# Altium PCB meteo_main.PcbDoc
Units mm, origin at the board's own origin, x right, y up, seen from the top; angles counter-clockwise.
Board outline 190 x 93 mm, 2 copper layers (Top Layer, Bottom Layer); 12 components, 63 nets, 42 pads, 0 vias.
Unrouted connection lines stored in the file: 5.
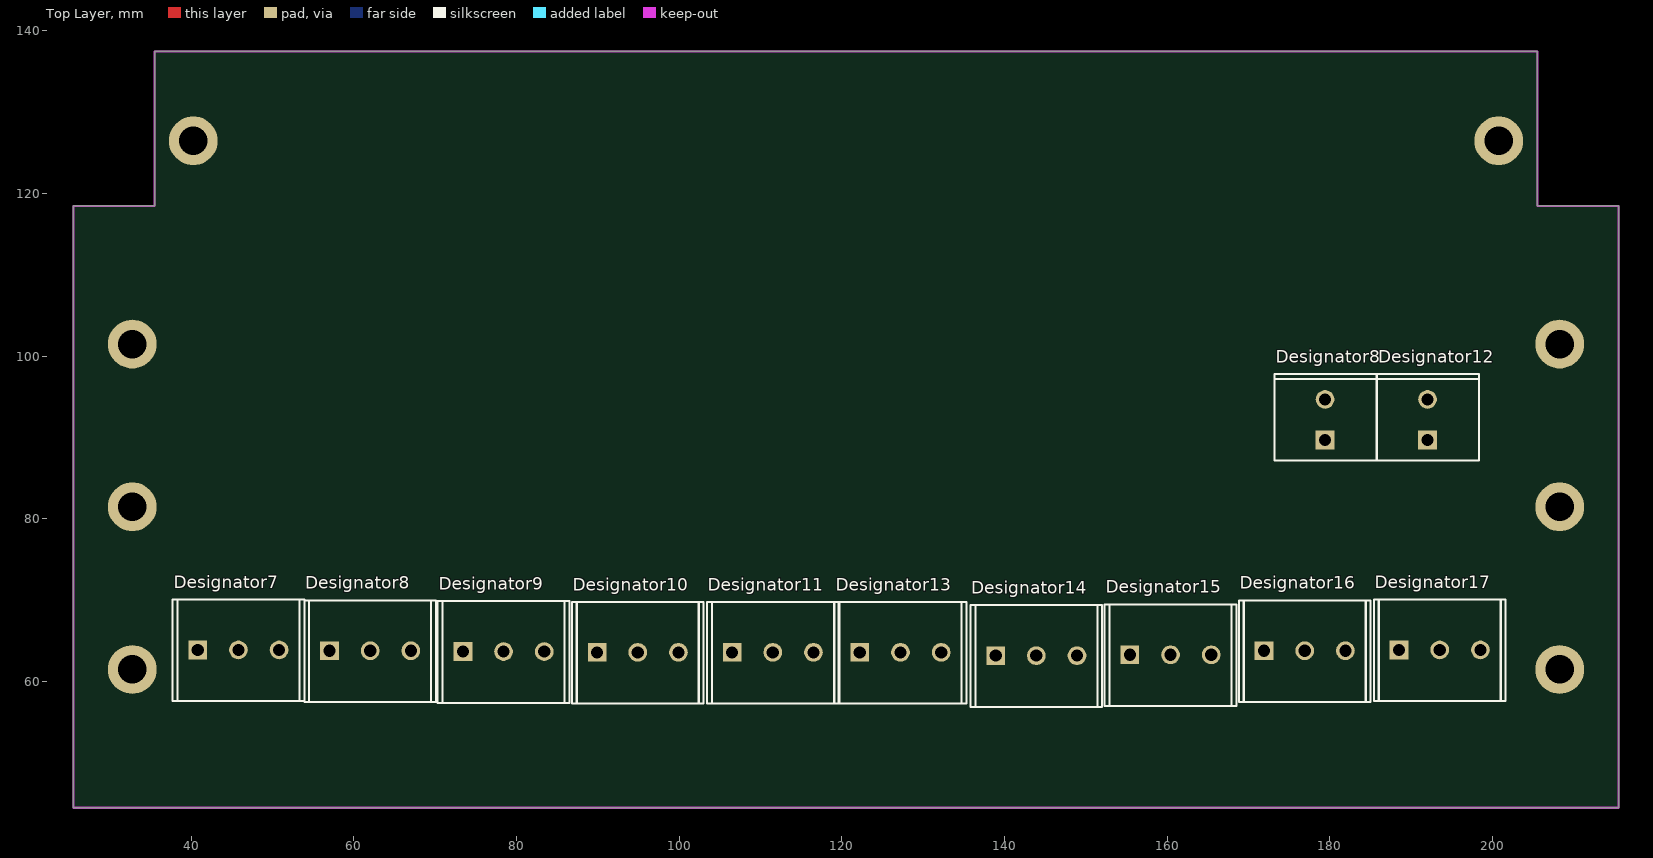
[diagram p0: Top Layer view]
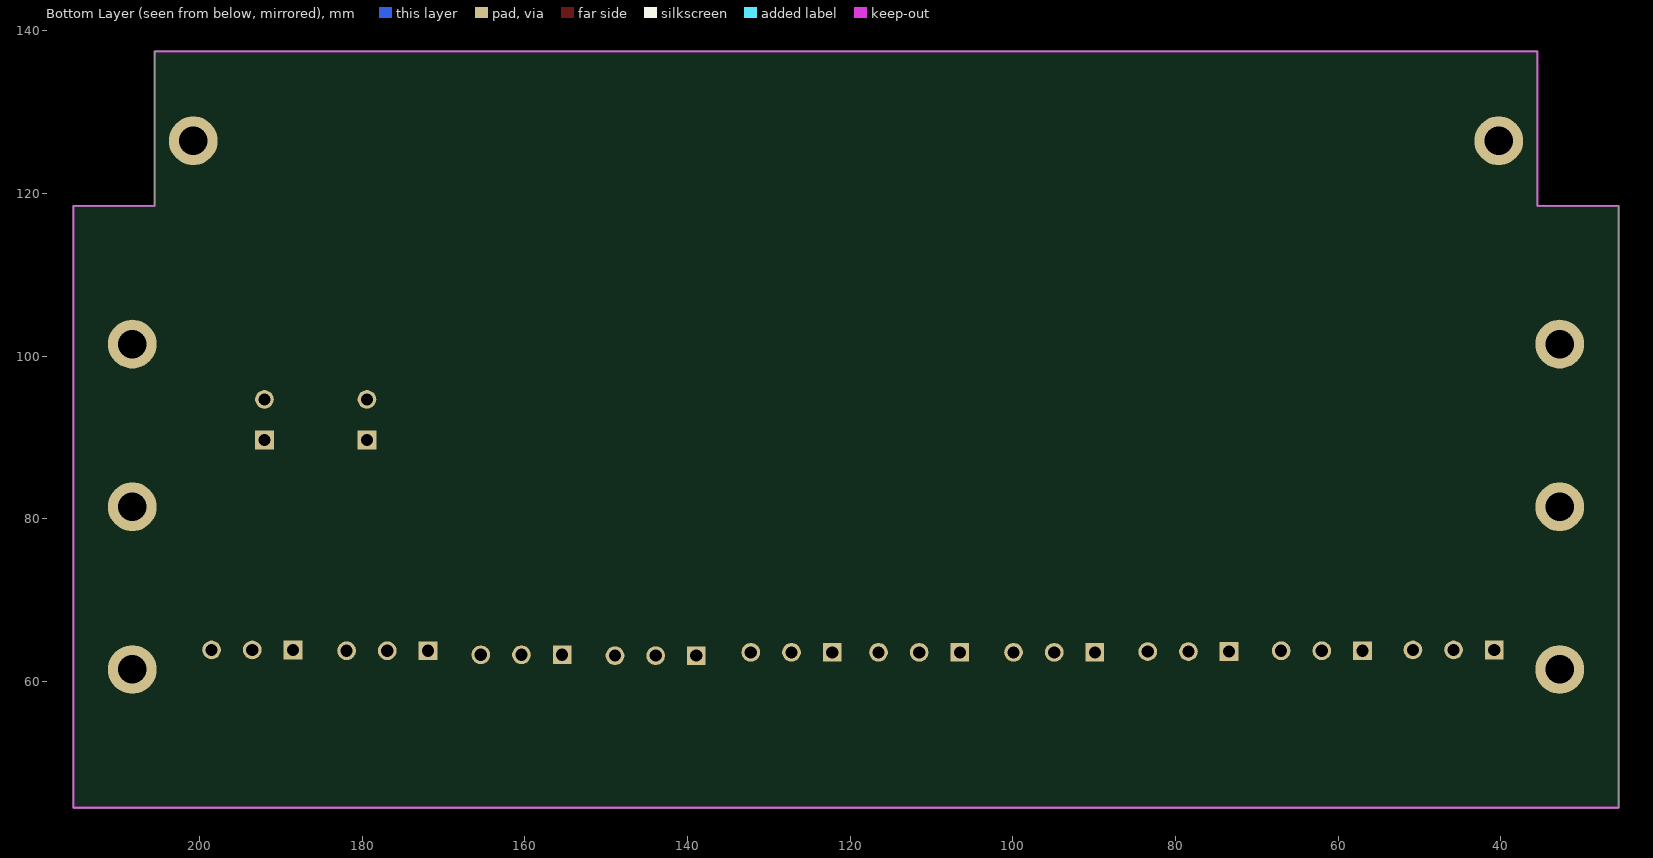
[diagram p1: Bottom Layer view, seen from below]

## Layer stack, top to bottom
Top Solder: solder mask 0.0102, Solder Resist, Dk 3.5
Top Layer: signal copper 0.0356
Dielectric 1: dielectric 0.32, FR-4, Dk 4.8
Bottom Layer: signal copper 0.0356
Bottom Solder: solder mask 0.0102, Solder Resist, Dk 3.5

## Board outline
25.5,44.5 25.5,118.5 35.5,118.5 35.5,137.5 205.5,137.5 205.5,118.5 215.5,118.5 215.5,44.5

## Design rules (kind name [scope] priority, off if disabled: settings)
Clearance Clearance_Poly [InPoly] p1: gap=0.4
Clearance [All] p2: gap=0.2
ComponentClearance [All] p1: gap=0 collisioncheckmode=3 verticalgap=0 showdistances=FALSE
HoleSize [All] p1: absolutevalues=TRUE maxlimit=6 minlimit=0.025 maxpercent=80.000 minpercent=20.000
MinimumSolderMaskSliver [All] p1: minsoldermaskwidth=0.1
PolygonConnect PolygonConnect_term [IsPad And (PadYSize_TopLayer > 1.5) And InComponent('DA3')] p1: connectstyle=Direct reliefconductorwidth=0.254 reliefentries=4 polygonreliefangle="90 Angle" airgapwidth=0.254
PolygonConnect PolygonConnect_via [IsVia] p2: connectstyle=Direct reliefconductorwidth=0.254 reliefentries=4 polygonreliefangle="90 Angle" airgapwidth=0.254
PolygonConnect [All] p3: connectstyle=Relief reliefconductorwidth=0.4 reliefentries=4 polygonreliefangle="90 Angle" airgapwidth=0.254
RoutingVias [All] p1: holewidth=0.4 width=0.8 viastyle="Through Hole" minholewidth=0.3 minwidth=0.6 maxholewidth=0.5 maxwidth=1
SilkToSilkClearance [All] p1: silktosilkclearance=0
SilkToSolderMaskClearance [IsPad] p1: minsilkscreentomaskgap=0.05 clearancetoexposedcopper=TRUE
SolderMaskExpansion SolderMaskExpansion_1 [IsPad And (PadYSize_TopLayer <= 0.45)] p1: expansion=0.05
SolderMaskExpansion SolderMaskExpansion_via [IsVia] p2: expansion=-10
SolderMaskExpansion [All] p3: expansion=0.076
Width [All] p1: maxlimit=1 minlimit=0.2 preferedwidth=0.3
25 further rules are at their usual default settings.

## Components (designator, comment, footprint, x,y, rotation, side; value= is the part's Value field where it differs from the comment)
Designator7 "Comment" DG330-5.0-03P 40.8,63.9 r0 top
Designator8 "Comment" 330-021 179.4,89.7 r90 top
Designator8 "Comment" DG330-5.0-03P 57,63.8 r0 top
Designator9 "Comment" DG330-5.0-03P 73.4,63.7 r0 top
Designator10 "Comment" DG330-5.0-03P 89.9,63.6 r0 top
Designator11 "Comment" DG330-5.0-03P 106.5,63.6 r0 top
Designator12 "Comment" 330-021 192,89.7 r90 top
Designator13 "Comment" DG330-5.0-03P 122.2,63.6 r0 top
Designator14 "Comment" DG330-5.0-03P 138.9,63.2 r0 top
Designator15 "Comment" DG330-5.0-03P 155.4,63.3 r0 top
Designator16 "Comment" DG330-5.0-03P 171.9,63.8 r0 top
Designator17 "Comment" DG330-5.0-03P 188.5,63.9 r0 top

## Footprints (in the part's own frame and the unit in brackets; to place one, negate y for a bottom-side part, rotate by r counter-clockwise, add the part's x,y. Pads: shape width x height; smd on the part's side, far side on the other; paste and mask are expansions set on the pad)
330-021 [mm]
  rect 2.3x2.3 hole 1.5: 1(0,0)
  round 2.3 hole 1.5: 2(5,0)
  silkscreen extent -2.5,-6.3 8.1,6.2
DG330-5.0-03P [mm]
  rect 2.3x2.3 hole 1.5: 1(0,0)
  round 2.3 hole 1.5: 2(5,0) 3(10,0)
  silkscreen extent -3.1,-6.3 13.1,6.2

## Free pads (board coordinates)
  round 6 hole 3.5 unplated: 0(32.75,81.5) 0(32.75,61.5) 0(32.75,101.5) 0(40.25,126.5) 0(200.75,126.5) 0(208.25,81.5) 0(208.25,61.5) 0(208.25,101.5)

## Nets (pads, with @x,y where several pads share a name; then routed paths per layer and width w, separated by ;. In a path a pad name is that pad's centre, name@x,y a point inside that pad or via, vN(x,y) a via of type N, cw(c..) or ccw(c..) an arc to the next point about the centre after c; other vN are vias at no path point)
+3V: 
ANALOG_OFF: 
C\S\0\: 
C\S\1\: 
DBG_RX: 
DBG_TX: 
GND: Designator9.3 Designator10.2 Designator11.2 Designator13.1 Designator14.3 Designator16.1
GSM_ON: 
MISO: 
MOSI: 
NetB1_2: 
NetC6_1: 
NetC13_1: Designator13.3
NetC17_1: 
NetC17_2: Designator14.2
NetC19_1: 
NetC22_1: 
NetC22_2: 
NetC27_1: 
NetC28_1: 
NetC29_1: 
NetDA2_5: 
NetDA3_3: 
NetDA3_5: 
NetDA3_7: 
NetDD1_1: 
NetDD1_2: 
NetDD3_24: 
NetDD3_25: 
NetR15_1: 
NetR17_1: 
NetR18_1: 
NetR21_1: Designator10.1
NetR23_1: 
NetR24_1: 
NetR33_1: 
NetR35_1: 
NetR36_1: 
NetVT6_3: 
PYR+: 
PYR-: Designator14.1
RAIN_L: 
RESET: 
RXD: 
S+: 
S-: 
SCK: 
SCL: 
SDA: 
SWD_CLK: 
SWD_IO: 
TXD: 
VBAT: 
VIN: Designator10.3
VREF: 
WIND_DIR: 
WIND_DIR_F: 
WIND_DIR_ON: 
WIND_DIR_PWR: 
WIND_SP_ON: 
WIND_SP_PWR: 
WIND_SPEED: 
WIND_SPEED_F: 
pads on no net: Designator7.1 Designator7.2 Designator7.3 Designator8.1 Designator8.2 Designator8.3 Designator9.1 Designator9.2 Designator11.1 Designator11.3 Designator12.1 Designator12.2 Designator13.2 Designator15.1 Designator15.2 Designator15.3 Designator16.2 Designator16.3 Designator17.1 Designator17.2 Designator17.3

## Keep-outs
Keep-Out Layer:
  lines w0.254: 25.5,44.5 25.5,118.5 35.5,118.5 35.5,137.5 205.5,137.5 205.5,118.5 213.4,118.5 215.5,118.5 215.5,44.5 25.5,44.5